# Altium PCB Gimbal_Power.PcbDoc
Units mm, origin at the board's own origin, x right, y up, seen from the top; angles counter-clockwise.
Board outline 42 x 37.59 mm, 2 copper layers (Top Layer, Bottom Layer); 12 components, 10 nets, 64 pads, 6 vias.
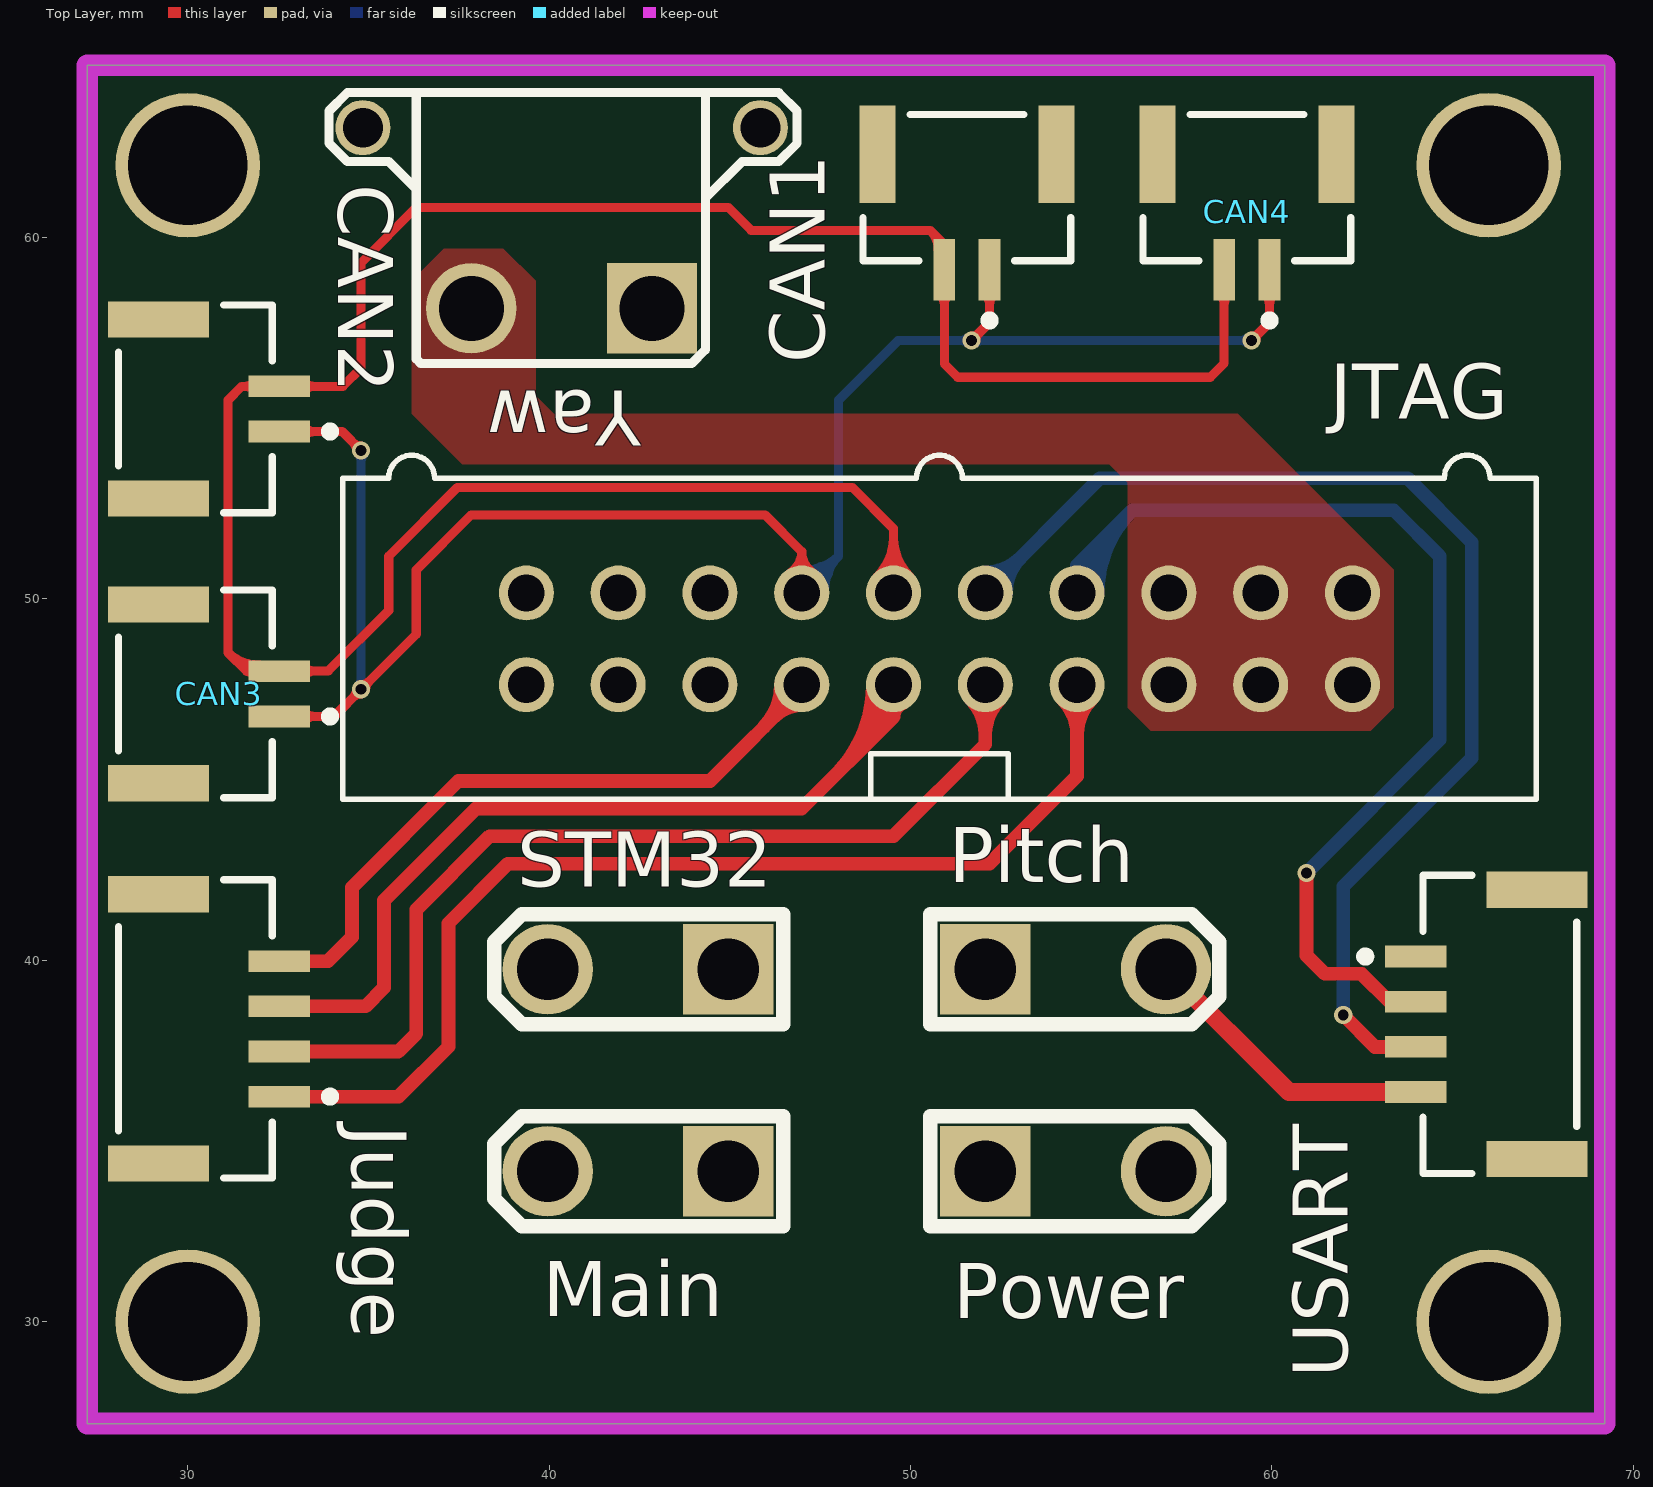
[diagram p0: Top Layer view]
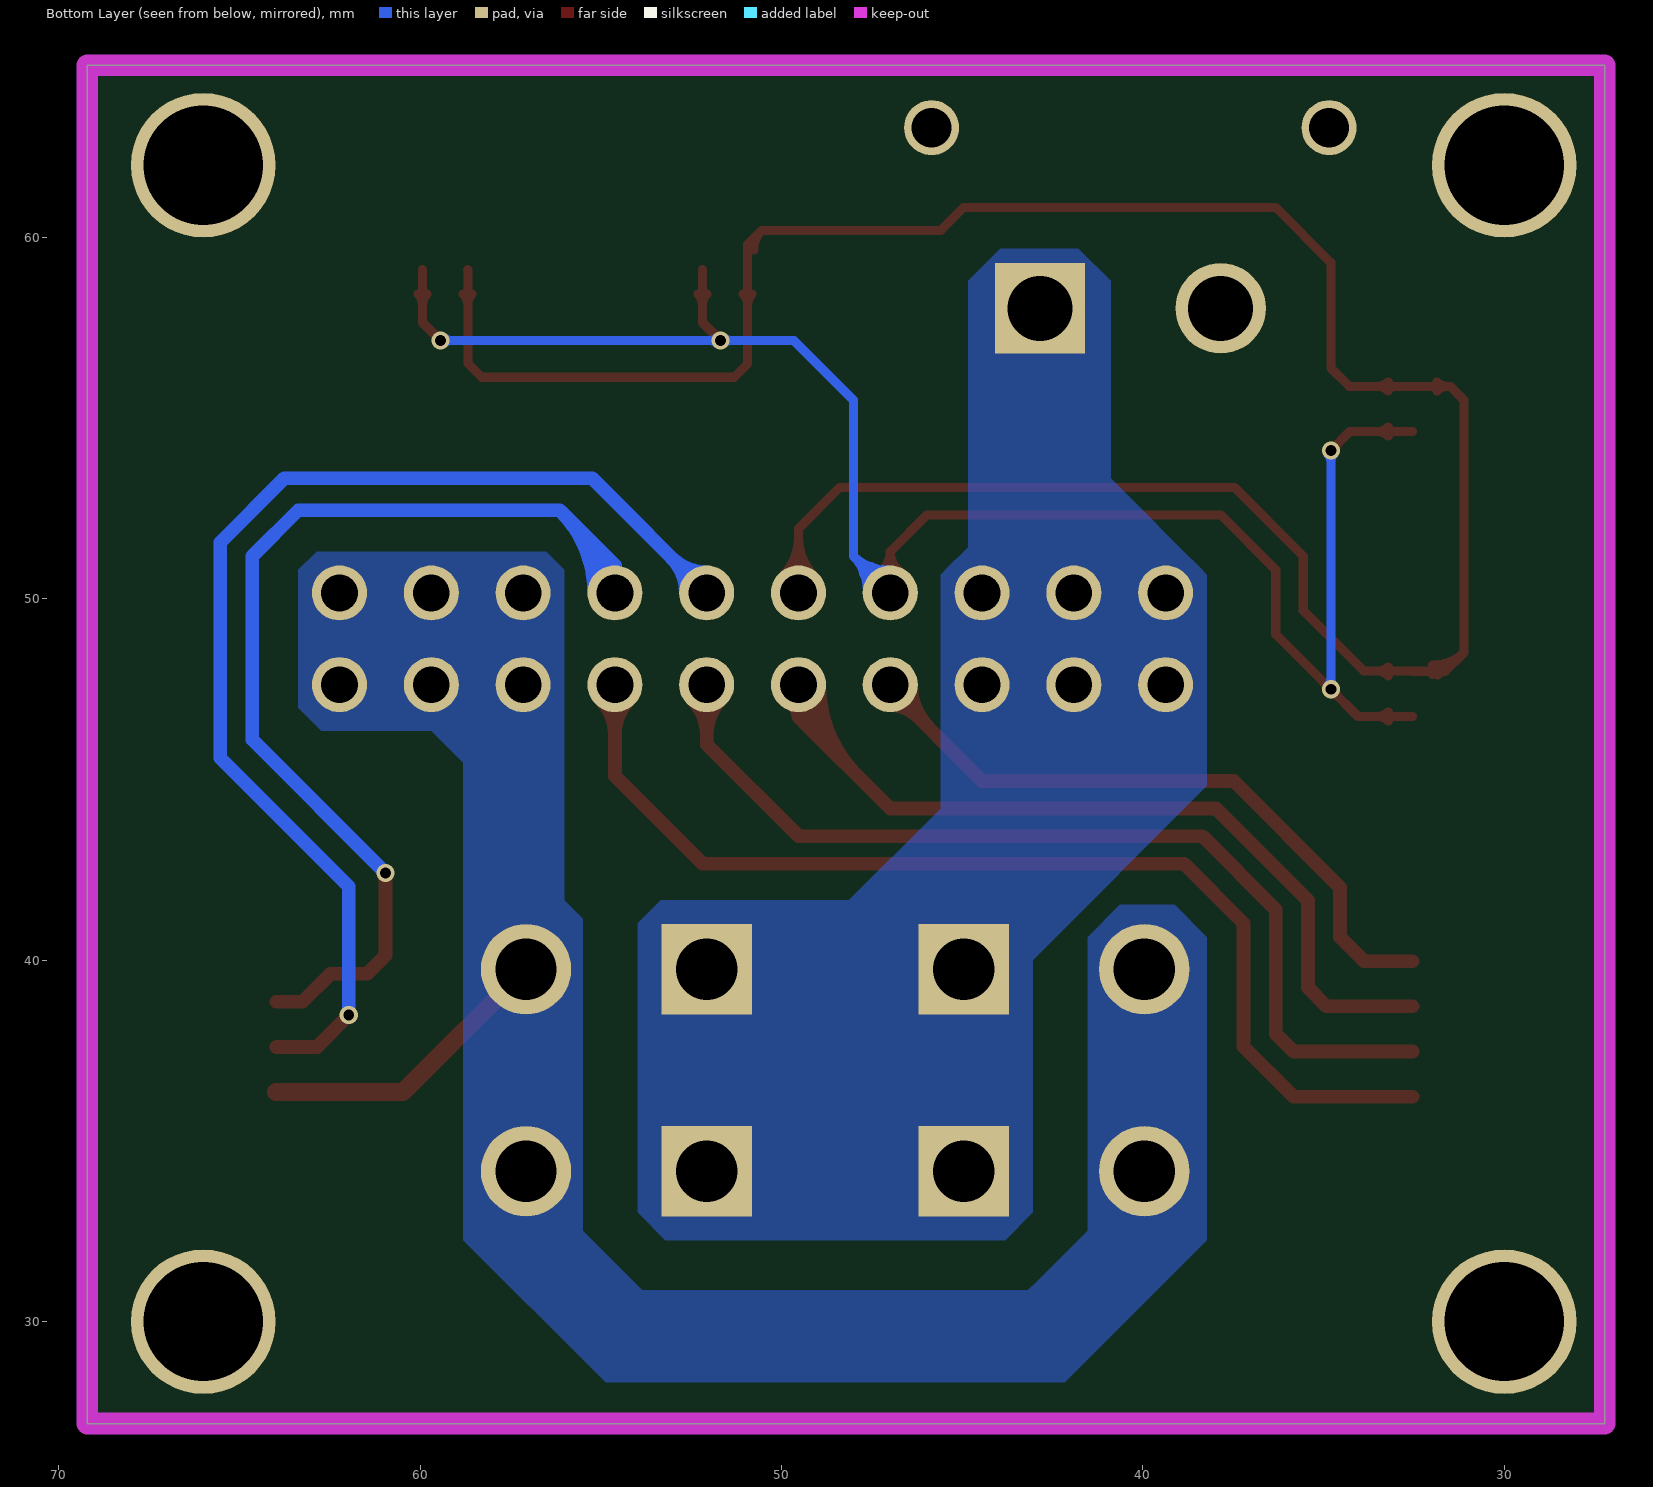
[diagram p1: Bottom Layer view, seen from below]
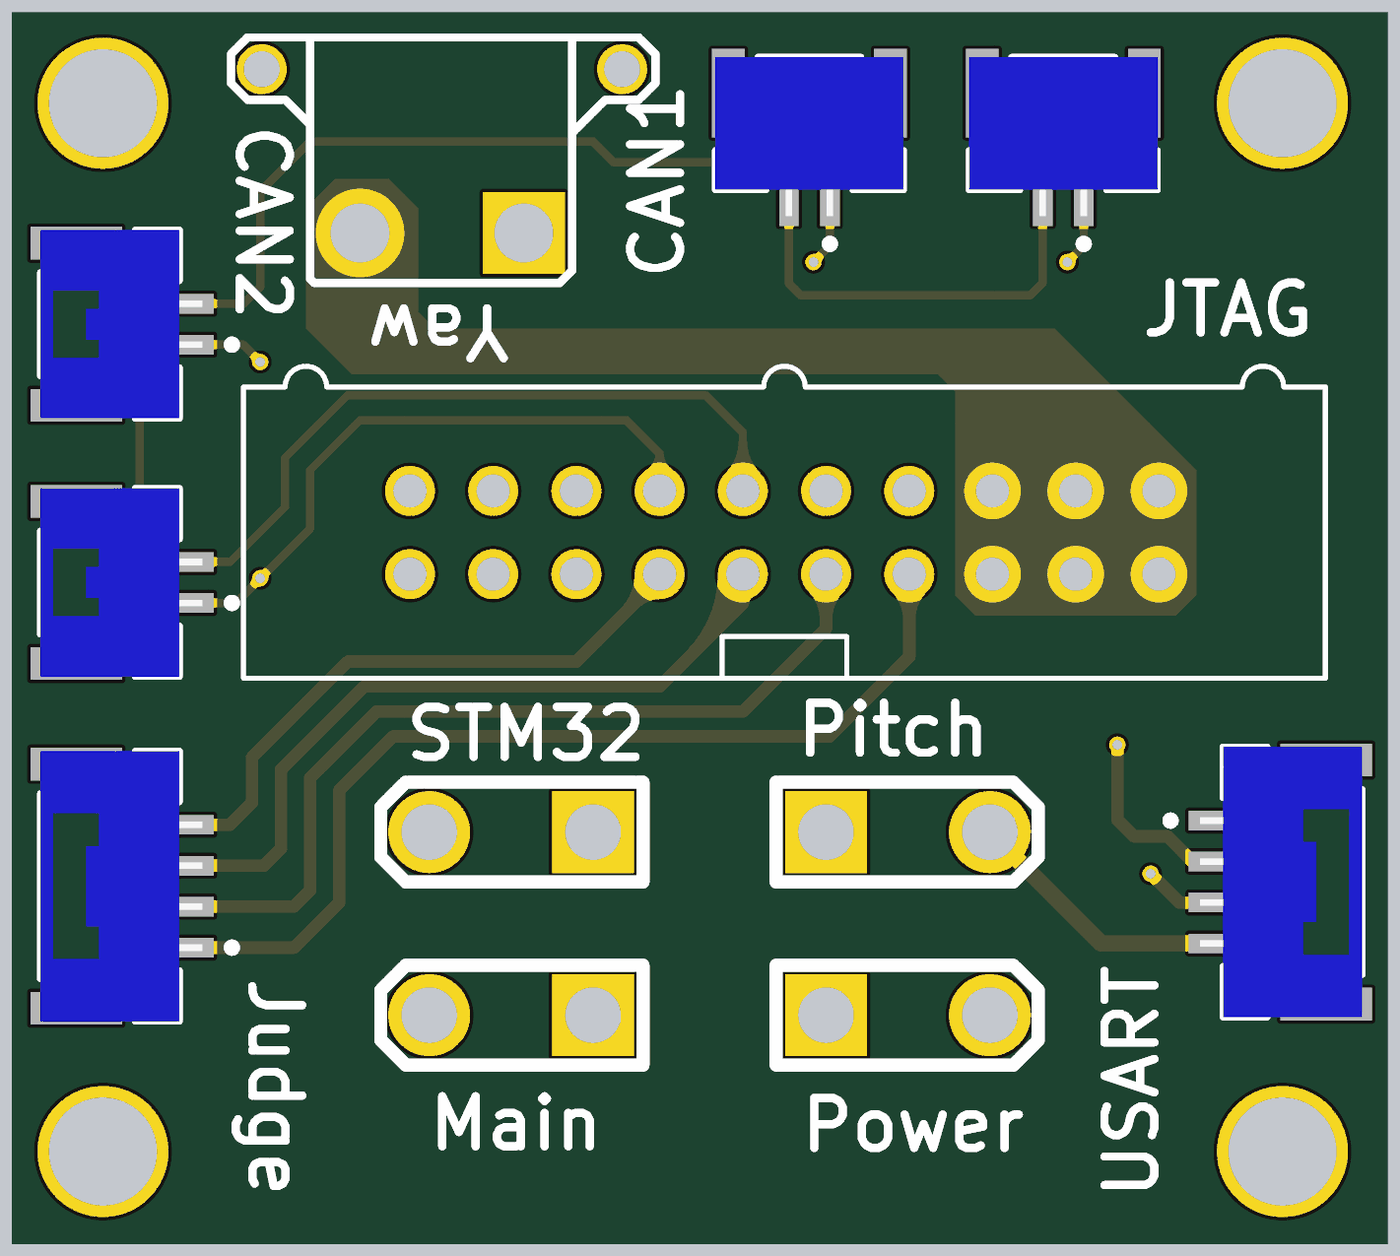
[diagram p2: 3D render of the assembled board from above, using the file's embedded part models]

## Layer stack, top to bottom
Top Solder: solder mask 0.0102, Solder Resist, Dk 3.5
Top Layer: signal copper 0.0356
Dielectric1: dielectric 0.32, FR-4, Dk 4.8
Bottom Layer: signal copper 0.0356
Bottom Solder: solder mask 0.0102, Solder Resist, Dk 3.5

## Board outline
27.215,27.178 69.215,27.178 69.215,64.77 27.215,64.77

## Design rules (kind name [scope] priority, off if disabled: settings)
Clearance [All] p1: gap=0.254 ignorepadtopadclearanceinfootprint=FALSE except(0: Arc-Hole Track-Hole SMDPad-Hole THPad-Hole Via-Hole Fill-Hole Poly-Hole Region-Hole Text-Hole)
HoleSize [All] p1: absolutevalues=TRUE maxlimit=5 minlimit=0.005 maxpercent=80.000 minpercent=20.000
PlaneConnect [All] p1: planeconnectstyle=Direct reliefexpansion=0.508 reliefentries=4 reliefconductorwidth=0.254 reliefairgap=0.254
PolygonConnect [All] p1: connectstyle=Direct reliefconductorwidth=0.254 reliefentries=4 polygonreliefangle="90 Angle" airgapwidth=0.254
RoutingVias [All] p1: holewidth=0.711 width=1.27 viastyle="Through Hole" minholewidth=0.01 minwidth=0.01 maxholewidth=0.711 maxwidth=1.27
SilkToSilkClearance [All] p1: silktosilkclearance=0.2
SilkToSolderMaskClearance [IsPad] p1: minsilkscreentomaskgap=-1 clearancetoexposedcopper=TRUE
SolderMaskExpansion [All] p1: expansion=0.102
Width [All] p1: maxlimit=0.5 minlimit=0.2 preferedwidth=0.254
26 further rules are at their usual default settings.

## Components (designator, comment, footprint, x,y, rotation, side; value= is the part's Value field where it differs from the comment)
CAN1 "CAN" JST-SM02B-GHS-TB_V 51.562,60.706 r180 top
CAN2 "CAN" JST-BM02B-GHS-TBT_V 30.861,55.255 r90 top
CAN3 "CAN" JST-BM02B-GHS-TBT_V 30.861,47.371 r90 top
CAN4 "SM02B-GHS-TB(LF)(SN)" JST-SM02B-GHS-TB_V 59.309,60.706 r180 top
JTAG "JTAG" IDC20S 39.37,47.625 r90 top
Judge "Judge" JST-BM04B-GHS-TBT_V 30.861,38.1 r90 top
Main "xt30" XT30 44.958,34.163 r180 top
Pitch "xt30" XT30 52.07,39.751 r0 top
Power "xt30" XT30 52.07,34.163 r0 top
STM32 "xt30" XT30 44.958,39.751 r180 top
USART "BM04B-GHS-TBT(LF)(SN)" JST-BM04B-GHS-TBT_V 65.659,38.227 r270 top
Yaw "XT30PW" XT30PW 37.846,58.039 r0 top

## Footprints (in the part's own frame and the unit in brackets; to place one, negate y for a bottom-side part, rotate by r counter-clockwise, add the part's x,y. Pads: shape width x height; smd on the part's side, far side on the other; paste and mask are expansions set on the pad)
IDC20S [mil]
  round 60 hole 40: 1(0,0) 2(100,0) 3(0,-100) 4(100,-100) 5(0,-200) 6(100,-200) 7(0,-300) 8(100,-300) 9(0,-400) 10(100,-400) 11(0,-500) 12(100,-500) 13(0,-600) 14(100,-600) 15(0,-700) 16(100,-700) 17(0,-800) 18(100,-800) 19(0,-900) 20(100,-900)
  silkscreen extent -125,-1100 250,200
JST-BM02B-GHS-TBT_V [mm] "Connector, 2-Leads, Body 5.75x4.25mm, Pitch 1.25mm"
  rect 0.6x1.7 smd: 1(-0.625,-1.675) 2(0.625,-1.675)
  rect 1x2.8 smd: MP1(-2.475,1.675) MP2(2.475,1.675)
  silkscreen extent -2.88,-3.2 2.88,2.78, body extent -2.88,-2.17 2.87,2.78, height 4.21
JST-BM04B-GHS-TBT_V [mm] "Connector, 4-Leads, Body 8.25x4.25mm, Pitch 1.25mm"
  rect 0.6x1.7 smd: 1(-1.875,-1.675) 2(-0.625,-1.675) 3(0.625,-1.675) 4(1.875,-1.675)
  rect 1x2.8 smd: MP1(-3.725,1.675) MP2(3.725,1.675)
  silkscreen extent -4.13,-3.2 4.13,2.78, body extent -4.12,-2.17 4.13,2.78, height 4.2
JST-SM02B-GHS-TB_V [mm] "SMD, 2-Leads, Body 5.75x4.05mm, Pitch 1.25mm"
  rect 0.6x1.7 smd: 1(-0.625,1.6) 2(0.625,1.6)
  rect 1x2.7 smd: MP1(-2.475,-1.6) MP2(2.475,-1.6)
  silkscreen extent -2.88,-2.7 2.88,3.12, body extent -2.87,-2.7 2.88,2.15, height 4.35
XT30 [mm]
  rect 2.5x2.5 hole 1.7: 1(0,0)
  round 2.5 hole 1.7: 2(5,0)
  silkscreen extent -1.52,-1.52 6.48,1.52
XT30PW [mm]
  rect 2.5x2.5 hole 1.8: 1(5,0)
  round 2.5 hole 1.8: 2(0,0)
  round 1.524 hole 1.1: 3(-3,5) 3(8,5)
  silkscreen extent -3.94,-1.52 9.02,5.97

## Part data
CAN1: library part SM02B-GHS-TB(LF)(SN), "GH Disconnectable Crimp Style Connector, Pitch 1.25 mm, 1 x 2 Position, Height 4.25 mm, -25 to 85 degC, RoHS, Tape and Reel", Manufacturer=JST, Package Description="GH Disconnectable Crimp Style Connector, Pitch 1.25 mm, 1 x 5 Position, Height 4.05 mm", Package Reference=BM05B-GHS-TBT, Datasheet URL=http://www.jst-mfg.com/product/pdf/eng/eGH.pdf, Datasheet Version=05/2016, Manufacturer URL=http://www.jst.com/home2.html, Mounting Technology=SurfaceMount, No of Positions=5, Pitch=1.25mm, Style/Orientation=StraightHeader/Plug, Termination=Crimp, Type=WiretoBoard
CAN2 CAN3: library part BM02B-GHS-TBT(LF)(SN), "GH Disconnectable Crimp Style Connector, Pitch 1.25 mm, 1 x 2 Position, Height 4.05 mm, -25 to 85 degC, RoHS, Tape and Reel", Manufacturer=JST, Package Description="GH Disconnectable Crimp Style Connector, Pitch 1.25 mm, 1 x 5 Position, Height 4.05 mm", Package Reference=BM05B-GHS-TBT, Datasheet URL=http://www.jst-mfg.com/product/pdf/eng/eGH.pdf, Datasheet Version=05/2016, Manufacturer URL=http://www.jst.com/home2.html, Mounting Technology=SurfaceMount, No of Positions=5, Pitch=1.25mm, Style/Orientation=StraightHeader/Plug, Termination=Crimp, Type=WiretoBoard
CAN4: "GH Disconnectable Crimp Style Connector, Pitch 1.25 mm, 1 x 2 Position, Height 4.25 mm, -25 to 85 degC, RoHS, Tape and Reel", Manufacturer=JST, Package Description="GH Disconnectable Crimp Style Connector, Pitch 1.25 mm, 1 x 5 Position, Height 4.05 mm", Package Reference=BM05B-GHS-TBT, Datasheet URL=http://www.jst-mfg.com/product/pdf/eng/eGH.pdf, Datasheet Version=05/2016, Manufacturer URL=http://www.jst.com/home2.html, Mounting Technology=SurfaceMount, No of Positions=5, Pitch=1.25mm, Style/Orientation=StraightHeader/Plug, Termination=Crimp, Type=WiretoBoard
Judge: library part BM04B-GHS-TBT(LF)(SN), "GH Disconnectable Crimp Style Connector, Pitch 1.25 mm, 1 x 4 Position, Height 4.05 mm, -25 to 85 degC, RoHS, Tape and Reel", Manufacturer=JST, Package Description="GH Disconnectable Crimp Style Connector, Pitch 1.25 mm, 1 x 5 Position, Height 4.05 mm", Package Reference=BM05B-GHS-TBT, Datasheet URL=http://www.jst-mfg.com/product/pdf/eng/eGH.pdf, Datasheet Version=05/2016, Manufacturer URL=http://www.jst.com/home2.html, Mounting Technology=SurfaceMount, No of Positions=5, Pitch=1.25mm, Style/Orientation=StraightHeader/Plug, Termination=Crimp, Type=WiretoBoard
USART: "GH Disconnectable Crimp Style Connector, Pitch 1.25 mm, 1 x 4 Position, Height 4.05 mm, -25 to 85 degC, RoHS, Tape and Reel", Manufacturer=JST, Package Description="GH Disconnectable Crimp Style Connector, Pitch 1.25 mm, 1 x 5 Position, Height 4.05 mm", Package Reference=BM05B-GHS-TBT, Datasheet URL=http://www.jst-mfg.com/product/pdf/eng/eGH.pdf, Datasheet Version=05/2016, Manufacturer URL=http://www.jst.com/home2.html, Mounting Technology=SurfaceMount, No of Positions=5, Pitch=1.25mm, Style/Orientation=StraightHeader/Plug, Termination=Crimp, Type=WiretoBoard

## Free pads (board coordinates)
  round 4 hole 3.3: 13(30,30) 13(30,62) 13(66,30) 13(66,62)

## Via types
v1: diameter 0.5, hole 0.3, Top Layer to Bottom Layer, 6 vias

## Nets (pads, with @x,y where several pads share a name; then routed paths per layer and width w, separated by ;. In a path a pad name is that pad's centre, name@x,y a point inside that pad or via, vN(x,y) a via of type N, cw(c..) or ccw(c..) an arc to the next point about the centre after c; other vN are vias at no path point)
24V: JTAG.1 JTAG.2 JTAG.3 JTAG.4 JTAG.5 JTAG.6 Main.1 Pitch.1 Power.1 STM32.1 Yaw.1
CAN_H: CAN1.1 CAN2.1 CAN3.1 CAN4.1 JTAG.8 | length 70.1
  Top Layer w0.254: CAN3.1 34.046,46.746 v1(34.798,47.498) 36.322,49.022 36.322,50.8 37.846,52.324 45.974,52.324 46.99,51.308 ; CAN2.1 34.27,54.63 v1(34.798,54.102) ; CAN3.1@33.208,46.624 cw(c33.504,46.328) 33.504,46.746 cw(c33.504,47.164) CAN3.1@33.208,46.868 ; CAN2.1@33.208,54.508 cw(c33.504,54.212) 33.504,54.63 cw(c33.504,55.048) CAN2.1@33.208,54.752 ; v1@34.675,47.498 cw(c34.378,47.498) 34.588,47.288 cw(c34.798,47.078) v1@34.798,47.375 ; v1@34.675,54.102 ccw(c34.378,54.102) 34.588,54.312 ccw(c34.798,54.522) v1@34.798,54.225 ; v1@34.798,47.621 ccw(c34.798,47.918) 35.008,47.708 ccw(c35.218,47.498) v1@34.921,47.498 ; JTAG.8 46.99,51.308 ; v1(51.689,57.15) 52.187,57.648 CAN1.1 ; v1@51.689,57.273 ccw(c51.689,57.57) 51.899,57.36 ccw(c52.109,57.15) v1@51.812,57.15 ; CAN1.1@52.065,58.434 cw(c51.769,58.138) 52.187,58.138 cw(c52.605,58.138) CAN1.1@52.309,58.434 ; v1(59.436,57.15) 59.934,57.648 CAN4.1 ; v1@59.436,57.273 ccw(c59.436,57.57) 59.646,57.36 ccw(c59.856,57.15) v1@59.559,57.15 ; CAN4.1@59.812,58.434 cw(c59.516,58.138) 59.934,58.138 cw(c60.352,58.138) CAN4.1@60.056,58.434 ; 46.99,51.308 cw(c46.279,51.308) 46.655,50.704 ccw(c46.279,51.308) 46.99,51.308 ; 46.99,51.308 ccw(c47.701,51.308) 47.325,50.704 cw(c47.701,51.308) 46.99,51.308
  Bottom Layer w0.254: v1@34.711,47.585 ccw(c34.501,47.795) 34.798,47.795 ccw(c35.095,47.795) v1@34.885,47.585 ; v1@34.711,54.015 cw(c34.501,53.805) 34.798,53.805 cw(c35.095,53.805) v1@34.885,54.015 ; v1(34.798,47.498) v1(34.798,54.102) ; JTAG.8@46.869,50.204 cw(c47.926,49.86) 47.689,50.945 ; JTAG.8 48.006,51.181 ; JTAG.8@47.029,50.044 ccw(c46.685,51.101) 47.77,50.864 ; v1@51.602,57.063 ccw(c51.392,56.853) 51.392,57.15 ccw(c51.392,57.447) v1@51.602,57.237 ; v1@51.776,57.063 cw(c51.986,56.853) 51.986,57.15 cw(c51.986,57.447) v1@51.776,57.237 ; v1@59.349,57.063 ccw(c59.139,56.853) 59.139,57.15 ccw(c59.139,57.447) v1@59.349,57.237 ; v1(59.436,57.15) v1(51.689,57.15) 49.657,57.15 48.006,55.499 48.006,51.181 ; 47.6,50.775 cw(c47.045,51.329) 47.008,50.546 ccw(c47.045,51.329) 47.6,50.775 ; 47.6,50.775 ccw(c48.154,50.22) 47.371,50.183 cw(c48.154,50.22) 47.6,50.775 ; 48.006,51.181 cw(c47.081,52.106) 47.02,50.799 ccw(c47.081,52.106) 48.006,51.181 ; 48.006,51.181 ccw(c48.931,50.256) 47.624,50.195 cw(c48.931,50.256) 48.006,51.181
CAN_L: CAN1.2 CAN2.2 CAN3.2 CAN4.2 JTAG.10 | length 82.5
  Top Layer w0.254: 31.532,48.097 ccw(c31.971,48.535) CAN3.2@31.988,47.915 ; CAN3.2@31.849,47.89 ccw(c31.633,47.722) 31.633,47.996 ; CAN3.2@31.849,48.102 cw(c31.633,48.27) 31.633,47.996 ; CAN2.2@31.864,55.758 ccw(c31.568,55.462) 31.568,55.88 ccw(c31.568,56.298) CAN2.2@31.864,56.002 ; CAN3.2@31.981,48.169 cw(c31.949,49.348) 31.115,48.514 ; CAN3.2@33.208,47.874 cw(c33.528,47.554) 33.528,48.006 ; CAN3.2@33.208,48.118 ccw(c33.48,48.39) 33.48,48.006 ; CAN2.2@33.208,55.758 cw(c33.504,55.462) 33.504,55.88 cw(c33.504,56.298) CAN2.2@33.208,56.002 ; JTAG.10 49.53,51.943 48.387,53.086 37.465,53.086 35.56,51.181 35.56,49.677 33.889,48.006 32.546,48.006 CAN3.2 31.633,47.996 ; CAN1.2@50.764,59.659 ccw(c50.019,59.671) 50.546,60.198 ; CAN1.2@50.815,58.434 cw(c50.519,58.138) 50.937,58.138 cw(c51.355,58.138) CAN1.2@51.059,58.434 ; CAN4.2@58.562,58.434 cw(c58.281,58.153) 58.678,58.153 ; 58.678,58.124 cw(c59.116,58.124) CAN4.2@58.806,58.434 ; CAN4.2 58.678,59.1 58.678,56.519 58.293,56.134 51.308,56.134 50.937,56.505 CAN1.2 50.937,59.807 50.546,60.198 ; 31.115,48.514 31.633,47.996 ; 31.115,48.514 31.115,55.499 31.496,55.88 CAN2.2 34.29,55.88 34.798,56.388 34.798,59.306 36.325,60.833 44.958,60.833 45.593,60.198 50.546,60.198 ; 49.53,51.085 cw(c48.61,51.085) 49.261,50.434 ccw(c48.61,51.085) 49.53,51.085 ; 49.53,51.085 ccw(c50.45,51.085) 49.799,50.434 cw(c50.45,51.085) 49.53,51.085 ; 49.53,51.698 cw(c47.997,51.698) 49.081,50.614 ccw(c47.997,51.698) 49.53,51.698 ; 49.53,51.698 ccw(c51.063,51.698) 49.979,50.614 cw(c51.063,51.698) 49.53,51.698
GND: JTAG.15 JTAG.16 JTAG.17 JTAG.18 JTAG.19 JTAG.20 Main.2 Pitch.2 Power.2 STM32.2 USART.4 Yaw.2 | length 8.3
  Top Layer w0.5: Pitch.2 60.469,36.352 USART.4
LINE1: JTAG.13 Judge.1 | length 32.4
  Top Layer w0.381: Judge.1 35.834,36.225 37.214,37.605 37.214,41.024 38.862,42.672 52.187,42.672 54.61,45.095 JTAG.13 ; JTAG.13@54.206,47.221 cw(c53.23,46.245) 54.61,46.245 cw(c55.99,46.245) JTAG.13@55.014,47.221
LINE2: JTAG.11 Judge.2 | length 28.9
  Top Layer w0.381: Judge.2 35.827,37.475 36.325,37.973 36.325,41.405 38.354,43.434 49.53,43.434 52.07,45.974 JTAG.11 ; JTAG.11@51.666,47.221 cw(c50.69,46.245) 52.07,46.245 cw(c53.45,46.245) JTAG.11@52.474,47.221
LINE3: JTAG.9 Judge.3 | length 29.7
  Top Layer w0.381: Judge.3 34.915,38.725 35.433,39.243 35.433,41.653 37.976,44.196 46.99,44.196 49.53,46.736 ; 47.926,45.132 ccw(c45.433,47.625) JTAG.9@48.959,47.625 ; 48.576,45.782 ccw(c46.733,47.625) JTAG.9@49.34,47.625 ; 49.227,46.433 ccw(c48.034,47.625) JTAG.9@49.721,47.625 ; JTAG.9@49.293,47.105 cw(c49.124,46.736) 49.53,46.736 ; JTAG.9 49.53,46.736 ; JTAG.9@49.767,47.105 ccw(c49.936,46.736) 49.53,46.736
LINE4: JTAG.7 Judge.4 | length 20.5
  Top Layer w0.381: Judge.4 33.879,39.975 34.544,40.64 34.544,42.017 37.485,44.958 44.45,44.958 JTAG.7@46.99,47.498 ; 45.925,46.433 ccw(c44.732,47.625) JTAG.7@46.419,47.625 ; 46.231,46.739 cw(c46.99,45.98) JTAG.7@46.99,47.053
RX: JTAG.14 USART.2 | length 33.5
  Top Layer w0.381: v1(60.96,42.418) 60.96,40.132 61.468,39.624 62.484,39.624 63.256,38.852 USART.2
  Bottom Layer w0.381: JTAG.14@54.419,50.165 cw(c55.799,50.165) 54.824,51.141 ; JTAG.14 54.61,50.927 56.134,52.451 63.373,52.451 64.643,51.181 64.643,46.101 v1(60.96,42.418) ; JTAG.14@54.8,50.165 cw(c57.1,50.165) 55.474,51.791 ; JTAG.14@55.181,50.165 cw(c58.401,50.165) 56.124,52.441
TX: JTAG.12 USART.3 | length 34.6
  Top Layer w0.381: v1(61.976,38.481) 62.855,37.602 USART.3
  Bottom Layer w0.381: JTAG.12 55.245,53.34 63.754,53.34 65.532,51.562 65.532,45.593 61.976,42.037 v1(61.976,38.481) ; JTAG.12@52.07,50.737 ccw(c52.07,52.116) 53.046,51.141 ccw(c54.021,50.165) JTAG.12@52.642,50.165
pads on no net: CAN1.MP1 CAN1.MP2 CAN2.MP1 CAN2.MP2 CAN3.MP1 CAN3.MP2 CAN4.MP1 CAN4.MP2 Judge.MP1 Judge.MP2 USART.1 USART.MP1 USART.MP2 Yaw.3

## Polygon pours and split planes (outlines as drawn)
GND on Bottom Layer "BottomLayer-GND" (solid, pour order 16): 41.529,33.274 41.529,33.02 41.529,32.512 42.926,31.115 43.18,30.861 46.736,30.861 54.356,30.861 52.959,30.861 53.594,30.861 53.848,30.861 55.499,32.512 55.499,33.274 58.801,33.274 58.801,32.258 55.118,28.575 52.324,28.575 55.118,28.575 54.864,28.321 54.61,28.321 46.99,28.321 43.307,28.321 42.164,28.321 38.227,32.258 38.227,33.274 41.529,33.274
24V on Bottom Layer "BottomLayer-GND" (solid, pour order 56): 38.227,50.673 38.989,51.435 40.132,52.578 40.894,53.34 40.894,58.293 40.894,58.928 40.894,58.801 41.783,59.69 42.418,59.69 43.942,59.69 44.831,58.801 44.831,57.531 44.831,51.435 45.593,50.673 38.227,50.673
GND on Bottom Layer "BottomLayer-GND" (solid, pour order 46): 55.499,40.64 55.499,41.148 56.007,41.656 56.007,44.704 56.007,50.292 56.007,50.8 56.515,51.308 62.357,51.308 62.865,51.308 63.373,50.8 63.373,47.371 63.373,46.99 62.738,46.355 60.325,46.355 59.69,46.355 58.801,45.466 58.801,40.64 55.499,40.64
GND on Bottom Layer "BottomLayer-GND" (solid, pour order 40): 58.801,40.513 58.801,40.64 57.912,41.529 56.388,41.529 55.499,40.64 55.499,39.243 55.499,33.274 56.388,32.385 57.277,32.385 57.912,32.385 58.801,33.274 58.801,34.798 58.801,40.513
GND on Bottom Layer "BottomLayer-GND" (solid, pour order 38): 38.227,40.386 38.227,40.64 39.116,41.529 40.64,41.529 41.529,40.64 41.529,39.116 41.529,33.401 41.529,33.274 40.64,32.385 39.116,32.385 38.227,33.274 38.227,40.386
24V on Bottom Layer "Bottom Layer-24V" (solid, pour order 7): 43.053,40.005 43.053,33.02 43.815,32.258 49.657,32.258 53.213,32.258 53.975,33.02 53.975,38.227 53.975,41.021 53.34,41.656 48.133,41.656 45.72,44.069 45.593,44.196 45.593,48.641 45.593,50.673 44.831,51.435 40.64,51.435 38.989,51.435 38.1,50.546 38.1,48.387 38.1,50.546 38.227,50.673 38.227,46.99 38.227,44.196 38.227,45.339 38.227,44.831 43.053,40.005
GND on Top Layer "TopLayer-GND" (solid, pour order 18): 36.195,56.642 36.195,55.245 36.195,55.118 37.592,53.721 39.624,53.721 39.624,56.642 36.195,56.642
GND on Top Layer "TopLayer-GND" (solid, pour order 54): 62.738,46.355 58.166,46.355 57.15,46.355 56.642,46.355 56.007,46.99 56.007,50.8 56.007,53.213 55.499,53.721 48.387,53.721 39.116,53.721 36.195,56.642 36.195,58.547 36.195,58.801 37.084,59.69 37.973,59.69 38.735,59.69 39.624,58.801 39.624,57.023 39.624,55.626 40.132,55.118 51.181,55.118 59.055,55.118 63.373,50.8 63.373,46.99 62.738,46.355

## Keep-outs
Keep-Out Layer:
  lines w0.254: 27.215,27.178 27.215,64.77 69.215,64.77 69.215,27.178 27.215,27.178
  lines w0.6: 27.215,27.178 27.215,64.77 69.215,64.77 69.215,27.178 27.215,27.178